# EAGLE board board1 (EAGLE 5.11)
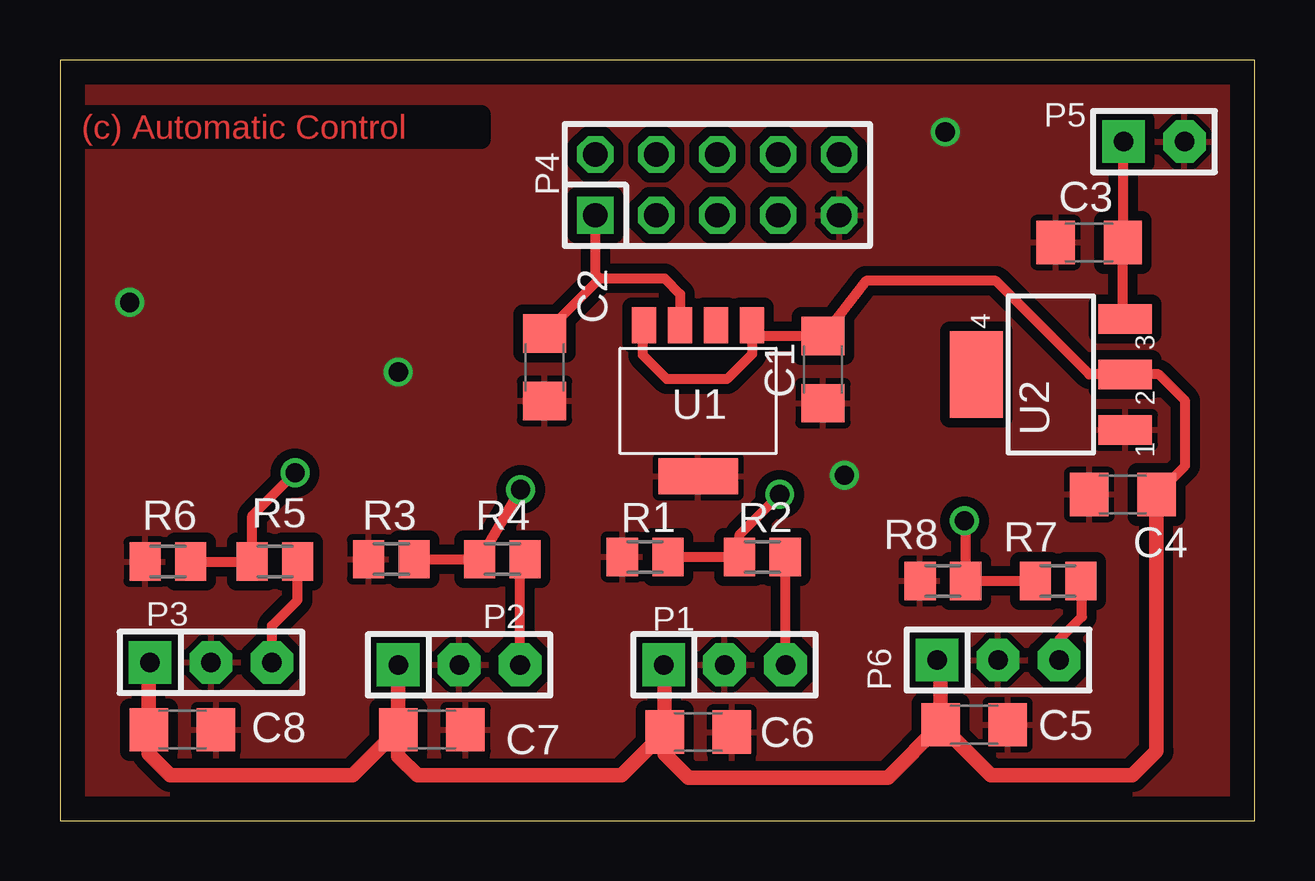
[diagram p0: board, top side]
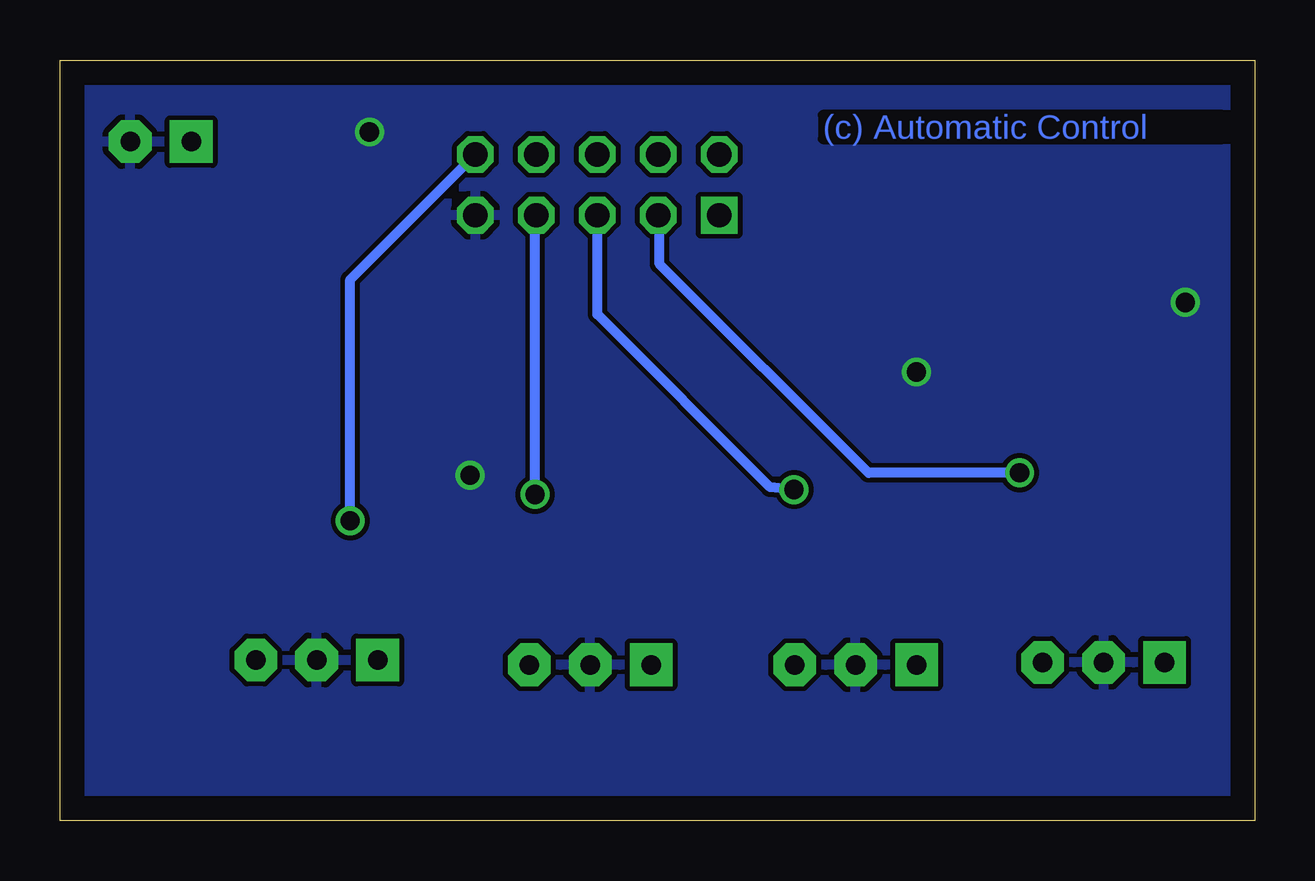
[diagram p1: board, bottom side, seen from below]

Size 49.8 x 31.7 mm. Coordinates in mm from the lower left corner, seen from the top.
Outline: 0,0 49.8,0 49.8,31.7 0,31.7 0,0
Copper layers (1*16): Top 0.035mm / dielectric 1.5mm / Bottom 0.035mm
Design rules "default *": minimum track width 10mil, minimum drill 24mil, track to track 8mil, track to pad 8mil, pad to pad 8mil, via to via 8mil, smd to smd 8mil, copper to edge 40mil, drill to drill 8mil, minimum pad ring 10mil, minimum via ring 8mil, stop-mask expansion 4mil, vias tented up to drill 0mil, thermal gap 10mil

## Footprints (pad centres in the part's own frame; a part is rotated, then mirrored left to right if it is on the bottom)
C3216 = smd 1.6 x 1.8: 1 -1.4,0; 2 1.4,0
SIP-100-03-32 = drill 0.813 pad 1.778 square: 1 -2.54,0 | drill 0.813 pad 1.778 octagon: 2 0,0; 3 2.54,0
DIL-100-2X05 = drill 1.016 square: 1 -5.08,-1.27 | drill 1.016 octagon: 2 -5.08,1.27; 3 -2.54,-1.27; 4 -2.54,1.27; 5 0,-1.27; 6 0,1.27; 7 2.54,-1.27; 8 2.54,1.27; 9 5.08,-1.27; 10 5.08,1.27
SIP-100-02-32 = drill 0.813 pad 1.778 square: 1 -1.27,0 | drill 0.813 pad 1.778 octagon: 2 1.27,0
M0805 = smd 1.3 x 1.6: 1 -0.95,0; 2 0.95,0
SOT223-5 = smd 1 x 1.5: 1 -2.25,-3.15; 2 -0.75,-3.15; 3 0.75,-3.15; 4 2.25,-3.15 | smd 3.3 x 1.5: 5 0,3.15
SOT223 = smd 1.219 x 2.235: 1 -2.311,-3.099; 2 0,-3.099; 3 2.311,-3.099 | smd 3.6 x 2.2: 4 0,3.099

## Placement (x,y rotation side)
C1  1u  [C3216]  31.8,18.8 90 top
C2  1u  [C3216]  20.2,18.9 90 top
C3  10u  [C3216]  42.9,24.1 0 top
C4  22u  [C3216]  44.3,13.6 0 top
C5  10u  [C3216]  38.1,4 180 top
C6  10u  [C3216]  26.6,3.7 180 top
C7  10u  [C3216]  15.5,3.8 180 top
C8  10u  [C3216]  5.1,3.8 180 top
P1  M-1X03-SIP-100-32  [SIP-100-03-32]  27.7,6.5 0 top
P2  M-1X03-SIP-100-32  [SIP-100-03-32]  16.64,6.5 0 top
P3  M-1X03-SIP-100-32  [SIP-100-03-32]  6.29,6.6 0 top
P4  M-2X05-DIL-100  [DIL-100-2X05]  27.4,26.5 0 top
P5  M-1X02-SIP-100-32  [SIP-100-02-32]  45.6,28.3 0 top
P6  M-1X03-SIP-100-32  [SIP-100-03-32]  39.1,6.7 0 top
R1  10K  [M0805]  24.39,11 0 top
R2  10K  [M0805]  29.28,11 0 top
R3  10K  [M0805]  13.81,10.9 0 top
R4  10K  [M0805]  18.44,10.9 0 top
R5  10K  [M0805]  8.96,10.8 180 top
R6  10K  [M0805]  4.5,10.8 180 top
R7  10K  [M0805]  41.6,10 180 top
R8  10K  [M0805]  36.8,10 180 top
U1  LP38692MP  [SOT223-5]  26.6,17.5 180 top
U2  AP1117E50G-13  [SOT223]  41.3,18.6 90 top

## Library data of the parts
C1-C8 = rcl
P1-P6 = con-headers-jp
R1-R8 = resistor
U1 = linear
U2 = oli

## Nets
GND: C1.1 C2.1 C3.1 C4.1 C5.1 C6.1 C7.1 C8.1 P1.2 P2.2 P3.2 P4.9 P5.2 P6.2 R1.1 R3.1 R6.2 R8.2 U1.5 U2.1
N$1: P4.7 R1.2 R2.1
N$2: C2.2 P4.1 U1.3
N$3: P4.5 R3.2 R4.1
N$4: P2.3 R4.2
N$5: P1.3 R2.2
N$7: P3.3 R5.1
N$8: C3.2 P5.1 U2.3
N$9: P4.10 R7.2 R8.1
N$10: P6.3 R7.1
N$11: P4.3 R5.2 R6.1
VCC: C1.2 C4.2 C5.2 C6.2 C7.2 C8.2 P1.1 P2.1 P3.1 P6.1 U1.1 U1.4 U2.2

## Tracks (layer width: path | path; a pad name or v marks a point on that pad's centre or on a via)
GND  (via drill 0.8 pad 0.81)
  other vias: 2.9,21.6 36.9,28.7 32.7,14.4 14.1,18.7
  pour Top (isolate 0.406): 0.4,0.4 0.4,30.7 49.1,30.7 49.2,0.3
  pour Bottom: 1.1,30.6 49.1,30.7 48.8,0.5 0.7,0.4 1,30.6
N$1  (via drill 0.8)
  Top 0.406: R1.2 R2.1 28.33,11.93 v30,13.6
  Bottom 0.406: v30,13.6 30,25.17 P4.7
N$2
  Top 0.406: U1.3 25.85,21.95 25.2,22.6 22.5,22.6 | C2.2 22.5,22.6 | P4.1 22.32,22.78 22.5,22.6
N$3  (via drill 0.8)
  Top 0.406: R3.2 R4.1 v19.2,13.8
  Bottom 0.406: v19.2,13.8 20.2,13.9 27.4,21.1 P4.5
N$4
  Top 0.406: P2.3 19.18,10.69 R4.2
N$5
  Top 0.406: P1.3 30.24,10.99 R2.2
N$7
  Top 0.406: P3.3 8.84,8.13 9.9,9.2 9.9,10.79 R5.1
N$8
  Top 0.406: P5.1 44.33,24.13 C3.2 44.3,21.01 U2.3
N$9  (via drill 0.8)
  Top 0.406: R7.2 R8.1 37.75,12.45 v37.7,12.5
  Bottom 0.406: v37.7,12.5 37.7,22.55 P4.10
N$10
  Top 0.406: P6.3 41.64,7.54 42.6,8.5 42.6,9.95 R7.1
N$11  (via drill 0.8)
  Top 0.406: R6.1 R5.2 8.01,12.71 v9.8,14.5
  Bottom 0.406: v9.8,14.5 16.1,14.5 24.8,23.2 24.8,25.17 P4.3
VCC
  Top 0.406: C4.2 46.9,14.8 46.9,17.5 45.8,18.6 U2.2 42.9,18.6 39,22.5 33.6,22.5 C1.2 29.3,20.2 U1.1 28.85,19.45 27.8,18.4 25.3,18.4 24.3,19.4 24.3,20.6 U1.4
  Top 0.61: C4.2 45.7,2.9 44.7,1.9 38.8,1.9 C5.2 | C5.2 36.7,6.56 P6.1 | C6.2 25.2,2.8 26.2,1.8 34.5,1.8 C5.2 | C6.2 25.2,6.46 P1.1 | C7.2 14.1,2.7 14.9,1.9 23.4,1.9 C6.2 | C7.2 P2.1 | C7.2 12.2,1.9 4.6,1.9 3.7,2.8 C8.2 3.7,6.54 P3.1

## Text on the board
Top: (c) Automatic Control
Bottom: (c) Automatic Control